# EAGLE board 119_02_INTELLIGENT_SENSOR_BOARD (EAGLE 9.6.2)
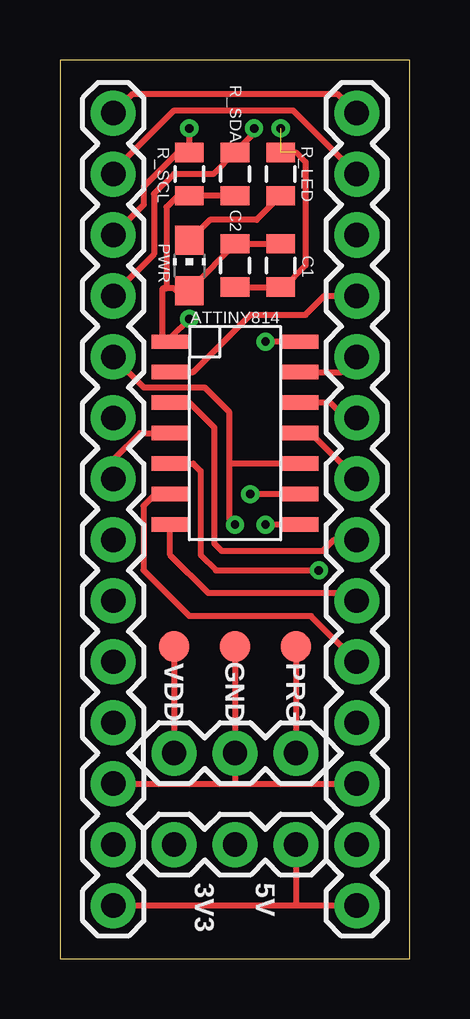
[diagram p0: board, top side]
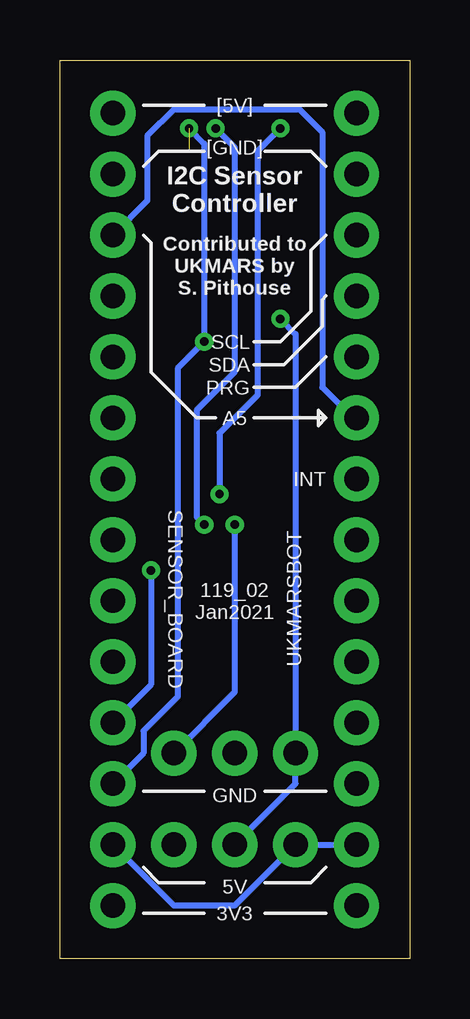
[diagram p1: board, bottom side, seen from below]

Size 14.59 x 37.45 mm. Coordinates in mm from the lower left corner, seen from the top.
Outline: 0,0 14.59,0 14.59,37.45 0,37.45 0,0
Copper layers (1*16): Top 0.035mm / dielectric 1.5mm / Bottom 0.035mm
Design rules "default *": minimum track width 6mil, minimum drill 0.35mm, track to track 6mil, track to pad 6mil, pad to pad 6mil, via to via 6mil, smd to smd 6mil, copper to edge 40mil, drill to drill 6mil, minimum pad ring 10mil, minimum via ring 8mil, stop-mask expansion 4mil, vias tented up to drill 36mil, thermal gap 10mil

## Footprints (pad centres in the part's own frame; a part is rotated, then mirrored left to right if it is on the bottom)
0805 = smd 0.8 x 1.2: 1 -0.9,0; 2 0.9,0
B1,27 = smd 1.27 x 1.27: TP 0,0
1X03 = drill 1.016 pad 1.88: 1 0,0; 2 2.54,0; 3 5.08,0
CHIP-LED0805 = smd 1.2 x 1.2: A 0,-1.05; C 0,1.05
1X14 = drill 1.016 pad 1.88: 1 0,0; 2 2.54,0; 3 5.08,0; 4 7.62,0; 5 10.16,0; 6 12.7,0; 7 15.24,0; 8 17.78,0; 9 20.32,0; 10 22.86,0; 11 25.4,0; 12 27.94,0; 13 30.48,0; 14 33.02,0
ATTINY814 = smd 1.55 x 0.6: P$1 -2.7,3.175; P$2 -2.7,1.905; P$3 -2.7,0.635; P$4 -2.7,-0.635; P$5 -2.7,-1.905; P$6 -2.7,-3.175; P$7 -2.7,-4.445; P$8 2.7,-4.445; P$9 2.7,-3.175; P$10 2.7,-1.905; P$11 2.7,-0.635; P$12 2.7,0.635; P$13 2.7,1.905; P$14 2.7,3.175

## Placement (x,y rotation side)
C1  0.1u  [0805]  9.21,28.89 270 top
C2  3.3u  [0805]  7.3,28.89 270 top
CONN_GND  TPB1,27  [B1,27]  7.3,13.02 0 top
CONN_UPDI  TPB1,27  [B1,27]  9.84,13.02 0 top
CONN_VDD  TPB1,27  [B1,27]  4.76,13.02 0 top
PRG  [1X03]  9.84,8.57 180 top
PWR  [CHIP-LED0805]  5.4,28.89 0 top
R_LED  470R  [0805]  9.21,32.7 270 top
R_SCL  [0805]  5.4,32.7 270 top
R_SDA  [0805]  7.3,32.7 270 top
SENSOR_BOARD  [1X14]  12.38,35.24 270 top
U$1  ATTINY814  [ATTINY814]  7.3,22.54 0 top
UKMARSBOT  [1X14]  2.22,35.24 270 top
V_SEL  [1X03]  9.84,4.76 180 top

## Library data of the parts
C1 C2 = SparkFun-Capacitors
CONN_GND CONN_UPDI CONN_VDD = testpad
PRG SENSOR_BOARD UKMARSBOT V_SEL = SparkFun-Connectors
PWR = led
R_LED R_SCL R_SDA = SparkFun-Passives
U$1 = Stephen

## Nets
3V3: SENSOR_BOARD.14 UKMARSBOT.14 V_SEL.1
5V: SENSOR_BOARD.13 UKMARSBOT.13 V_SEL.3
[5V]: SENSOR_BOARD.1 UKMARSBOT.1
[GND]: SENSOR_BOARD.2 UKMARSBOT.2
A0: SENSOR_BOARD.8 U$1.P$3
A1: SENSOR_BOARD.7 U$1.P$11
A2: SENSOR_BOARD.6 U$1.P$12
A3: SENSOR_BOARD.5 U$1.P$13
A4: SENSOR_BOARD.4 U$1.P$2
A5: SENSOR_BOARD.3 UKMARSBOT.6
D6: SENSOR_BOARD.11 U$1.P$5
D11: SENSOR_BOARD.9 U$1.P$7
D12: SENSOR_BOARD.10 U$1.P$6
GND: C1.2 C2.2 CONN_GND.TP PRG.2 R_LED.1 SENSOR_BOARD.12 U$1.P$14 UKMARSBOT.12
INTERRUPT: U$1.P$4 UKMARSBOT.7
N$1: PWR.C R_LED.2
SCL: R_SCL.1 U$1.P$9 UKMARSBOT.3
SDA: R_SDA.1 U$1.P$8 UKMARSBOT.4
UPDI: CONN_UPDI.TP PRG.1 U$1.P$10 UKMARSBOT.5
VDD: C1.1 C2.1 CONN_VDD.TP PRG.3 PWR.A R_SCL.2 R_SDA.2 U$1.P$1 V_SEL.2

## Tracks (layer width: path | path; a pad name or v marks a point on that pad's centre or on a via)
3V3
  Top 0.254: SENSOR_BOARD.14 9.84,2.22 | V_SEL.1 9.84,2.22 | 9.84,2.22 UKMARSBOT.14
5V
  Bottom 0.254: UKMARSBOT.13 V_SEL.3 7.3,2.22 9.84,2.22 SENSOR_BOARD.13
[5V]
  Top 0.254: SENSOR_BOARD.1 11.59,36.04 3.02,36.04 UKMARSBOT.1
[GND]
  Top 0.254: UKMARSBOT.2 2.22,32.82 4.76,35.36 9.73,35.36 SENSOR_BOARD.2
A0
  Top 0.254: U$1.P$3 5.4,23.18 6.44,22.13 6.44,17.3 6.76,16.99 10.95,16.99 11.43,17.46 SENSOR_BOARD.8
A1
  Top 0.254: U$1.P$11 10.48,21.91 SENSOR_BOARD.7
A2
  Top 0.254: SENSOR_BOARD.6 11.91,22.54 11.27,23.18 U$1.P$12
A3
  Top 0.254: U$1.P$13 11.75,24.45 SENSOR_BOARD.5
A4
  Top 0.254: U$1.P$2 5.56,24.45 7.95,26.84 10.24,26.84 11.03,27.62 SENSOR_BOARD.4
A5
  Bottom 0.254: SENSOR_BOARD.3 10.95,31.59 10.95,34.29 9.84,35.4 4.6,35.4 3.65,34.45 3.65,23.81 2.38,22.54 UKMARSBOT.6
D6  (via drill 0.35)
  Top 0.254: U$1.P$5 5.56,20.64 5.87,20.32 5.87,16.83 6.51,16.19 v10.79,16.19
  Bottom 0.254: v10.79,16.19 10.79,11.43 SENSOR_BOARD.11
D11
  Top 0.254: SENSOR_BOARD.9 12.07,15.24 6.19,15.24 4.6,16.83 U$1.P$7
D12
  Top 0.254: SENSOR_BOARD.10 10.48,14.29 5.4,14.29 3.49,16.2 3.48,18.88 3.97,19.37 U$1.P$6
GND  (via drill 0.35)  (2 unrouted)
  Top 0.254: C2.2 C1.2 9.35,27.99 10.25,28.89 10.25,33.2 9.84,33.6 | UKMARSBOT.12 7.3,7.3 | 7.3,7.3 SENSOR_BOARD.12 | U$1.P$14 v8.57,25.72 | CONN_GND.TP PRG.2 7.3,7.3
  Bottom 0.254: v9.21,34.61 8.57,33.97 v8.57,25.72 9.68,24.61 9.68,10.93 11.11,9.5 11.11,8.57 SENSOR_BOARD.12
INTERRUPT
  Top 0.254: UKMARSBOT.7 2.22,20.8 3.33,21.91 U$1.P$4
N$1
  Top 0.254: R_LED.2 8.2,30.8 6.25,30.8 PWR.C
SCL  (via drill 0.35)
  Top 0.254: U$1.P$9 v7.94,19.37 | UKMARSBOT.3 3.49,31.43 3.49,32.17 4.92,33.6 R_SCL.1 v5.4,34.61
  Bottom 0.254: v5.4,34.61 6.35,33.66 6.35,23.5 7.94,21.91 v7.94,19.37
SDA  (via drill 0.35)
  Top 0.254: U$1.P$8 v8.57,18.1 | UKMARSBOT.4 2.22,27.67 3.92,29.37 3.92,31.87 4.75,32.7 6.4,32.7 R_SDA.1 8.1,34.4 v8.1,34.61
  Bottom 0.254: v8.1,34.61 7.3,33.81 7.3,24.45 8.89,22.86 8.89,18.41 v8.57,18.1
UPDI  (via drill 0.35)
  Top 0.254: UKMARSBOT.5 3.49,23.81 6.03,23.81 7.06,22.78 7.06,20.64 | v7.3,18.1 7.06,18.34 7.06,20.64 | U$1.P$10 7.06,20.64 | CONN_UPDI.TP PRG.1
  Bottom 0.254: PRG.1 7.3,11.11 v7.3,18.1
VDD  (via drill 0.35)
  Top 0.254: C1.1 C2.1 5.55,27.99 PWR.A 4.86,27.84 4.76,27.94 4.45,27.94 | R_SDA.2 R_SCL.2 4.92,31.8 4.45,31.33 4.45,27.94 | 4.45,27.94 4.29,27.94 4.29,25.72 U$1.P$1 4.6,25.87 v5.4,26.67 | CONN_VDD.TP PRG.3
  Bottom 0.254: v5.4,26.67 4.76,26.03 PRG.3 4.76,7.3 V_SEL.2

## Text on the board
tNames: VDD | GND | PRG | 3V3 | 5V
bNames: [5V] | [GND] | I2C Sensor / Controller | Contributed to / UKMARS by / S. Pithouse | SCL | SDA | PRG | A5 | INT | 119_02 / Jan2021 | GND | 5V | 3V3